# EAGLE board RAM (EAGLE 9.3.2), part 1 of 2
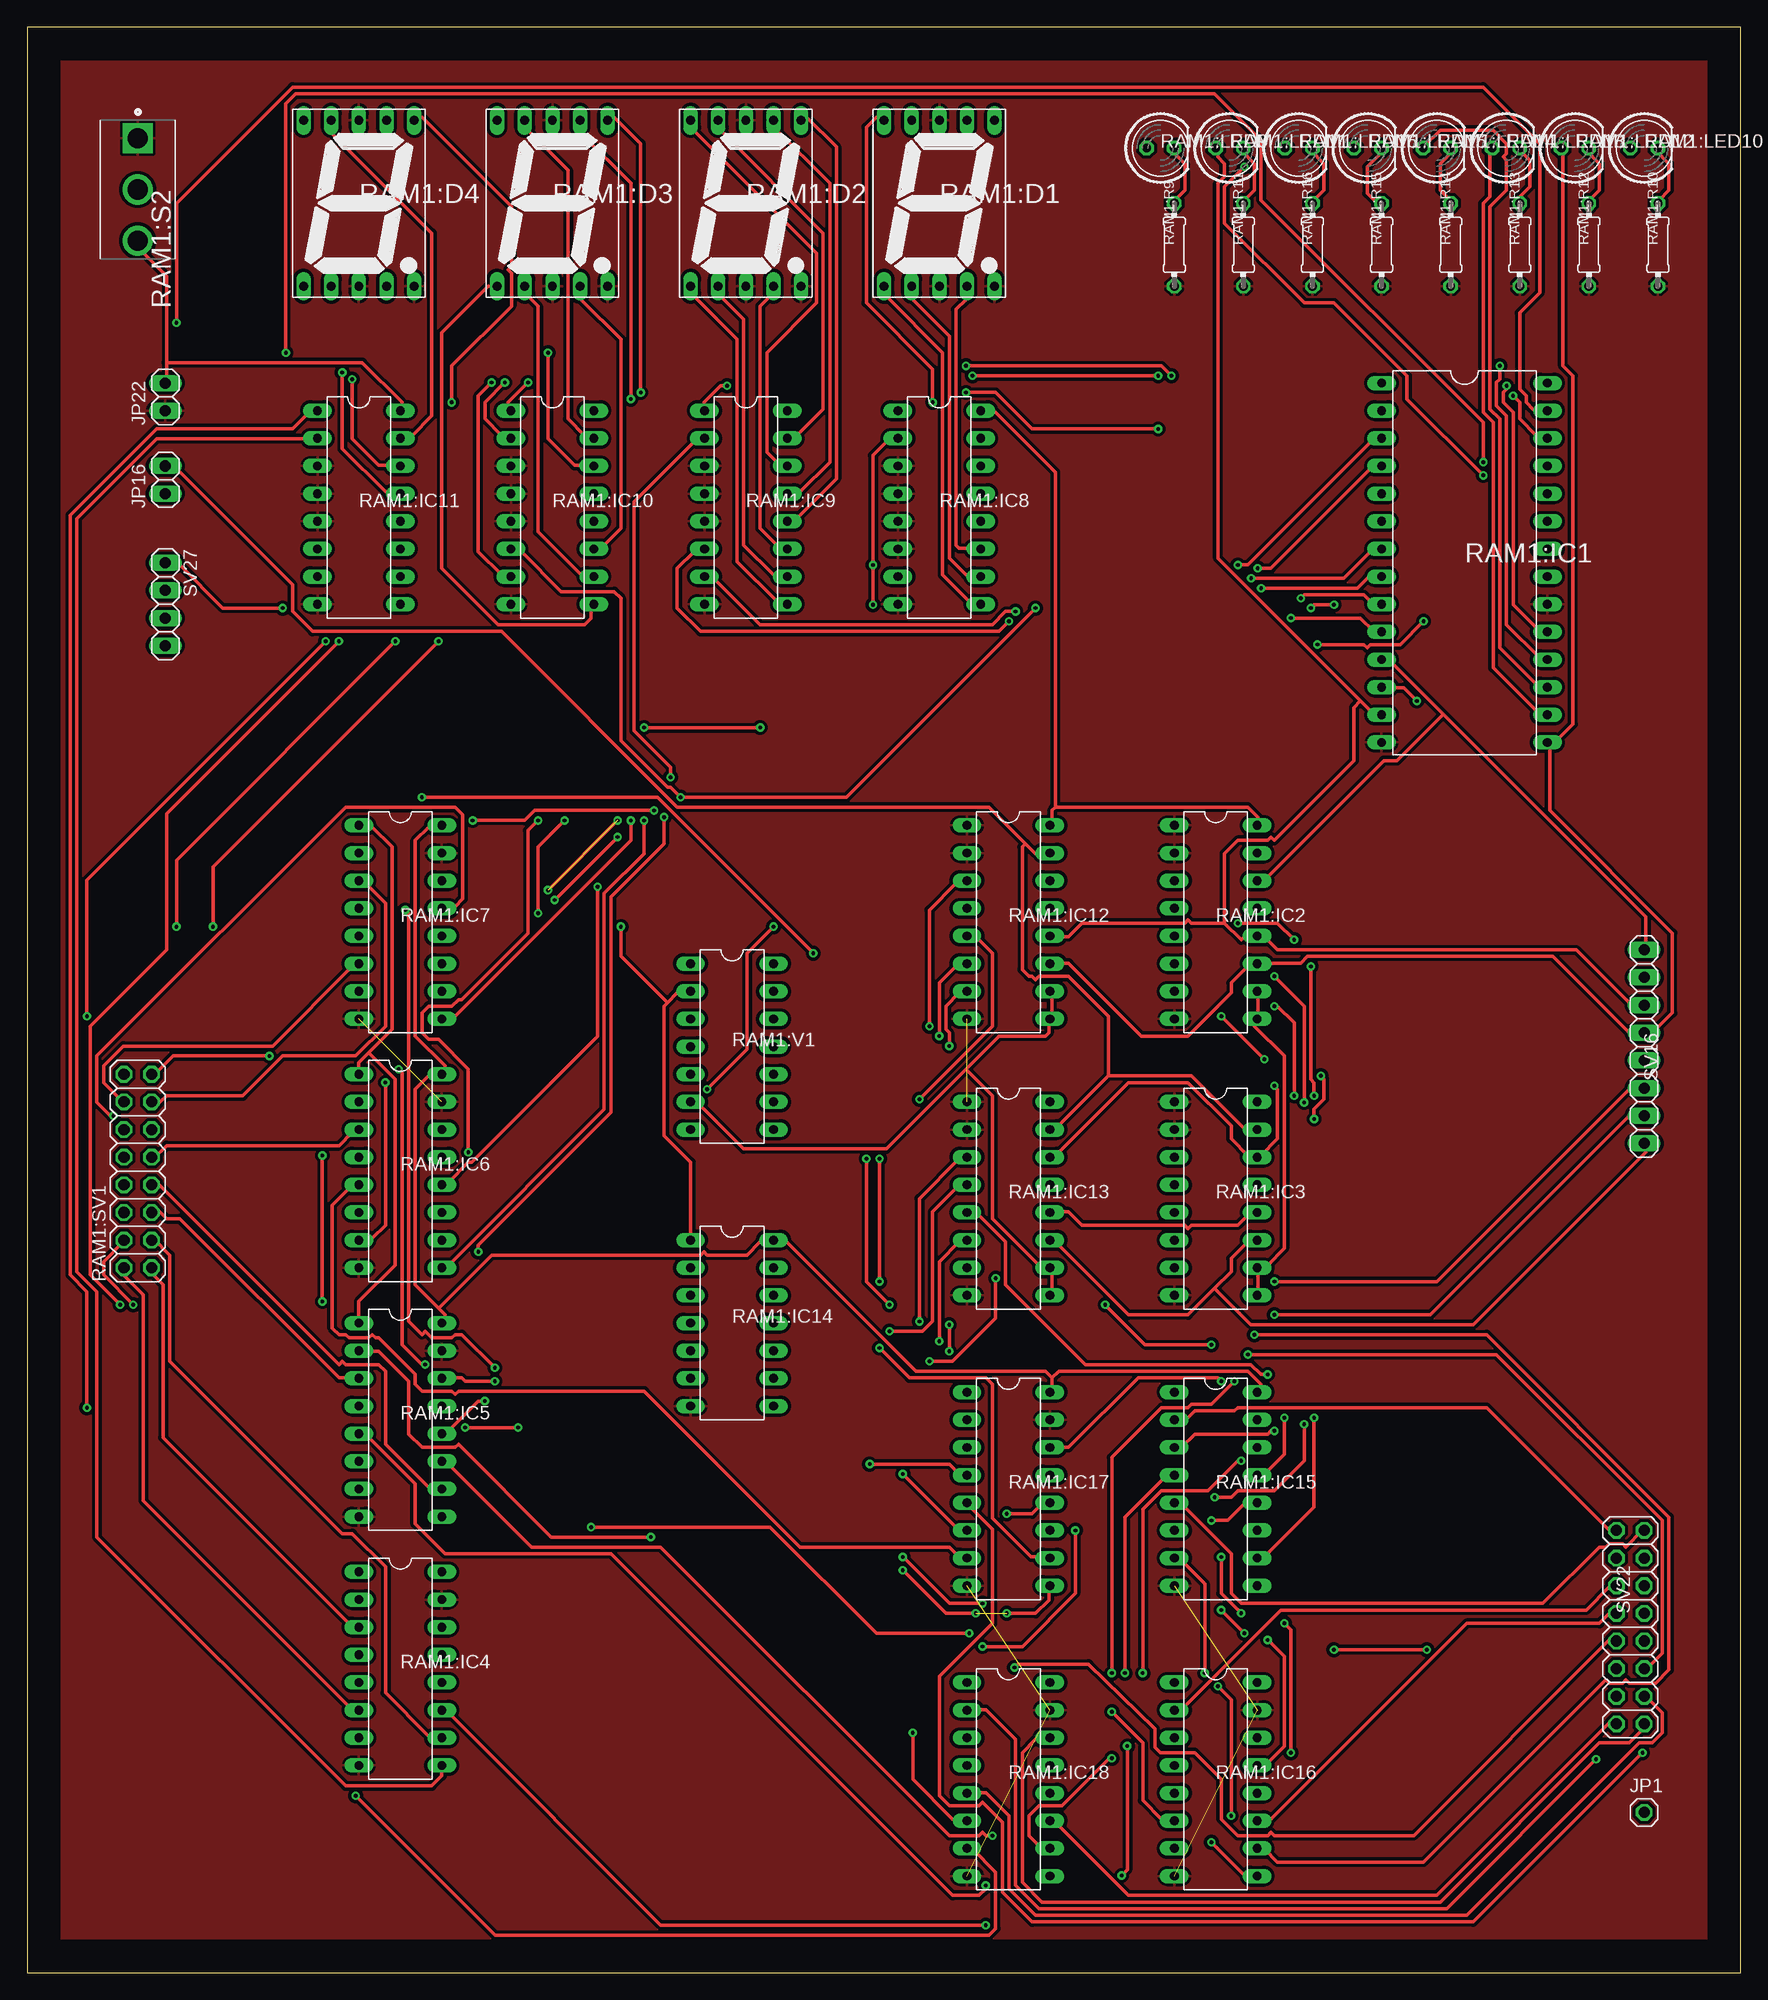
[diagram p0: board, top side]
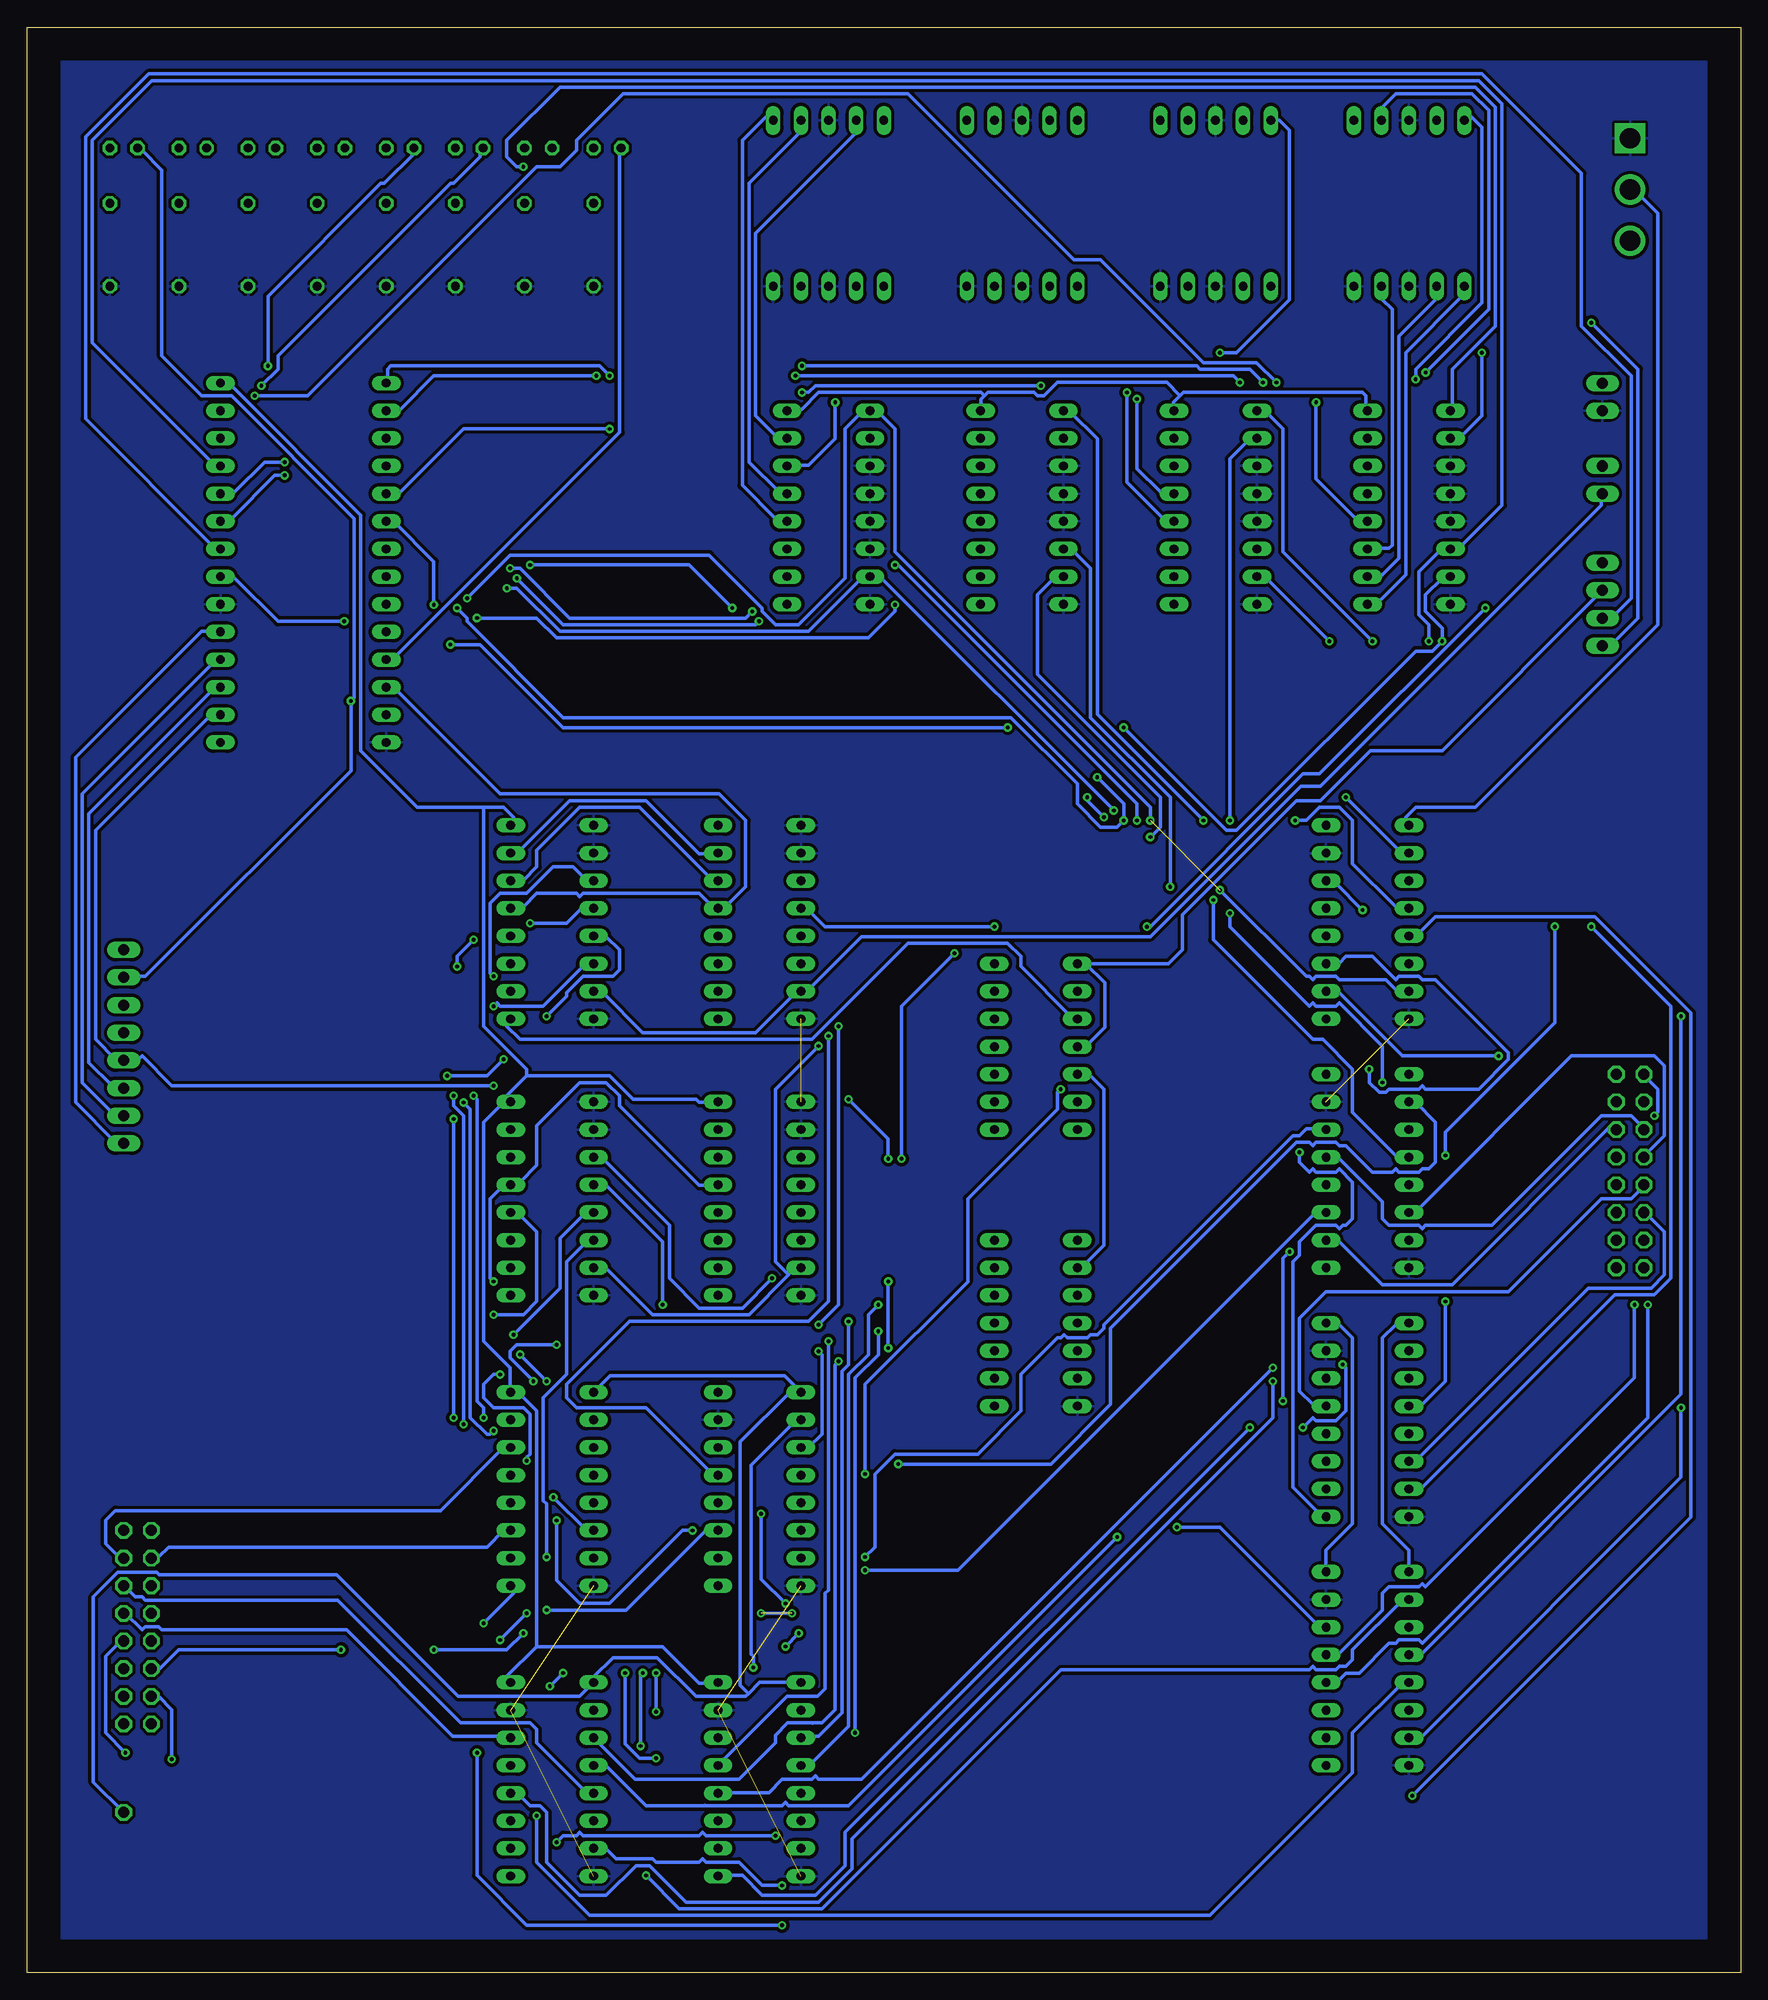
[diagram p1: board, bottom side, seen from below]

Size 157.46 x 178.74 mm. Coordinates in mm from the lower left corner, seen from the top.
Outline: 0,0 157.46,0 157.46,178.74 0,178.74 0,0
Copper layers (1*16): Top 0.035mm / dielectric 1.5mm / Bottom 0.035mm
Design rules "Endustriyel": minimum track width 12mil, minimum drill 0.35mm, track to track 12mil, track to pad 12mil, pad to pad 12mil, via to via 12mil, smd to smd 6mil, copper to edge 120mil, drill to drill 12mil, minimum pad ring 10mil, minimum via ring 8mil, stop-mask expansion 4mil, vias tented up to drill 0mil, thermal gap 10mil
Net classes: 0 default: width 0.254 mm

## Footprints (pad centres in the part's own frame; a part is rotated, then mirrored left to right if it is on the bottom)
1X01 = drill 1.016 octagon: 1 0,0
1X02 = drill 1.016 long: 1 -1.27,0; 2 1.27,0
7SEG-13 = drill 0.813 long: 1 -5.08,-7.62; 2 -2.54,-7.62; 3 0,-7.62; 4 2.54,-7.62; 5 5.08,-7.62; 6 5.08,7.62; 7 2.54,7.62; 8 0,7.62; 9 -2.54,7.62; 10 -5.08,7.62
DIL28-6 = drill 0.813 long: 1 -16.51,-7.62; 2 -13.97,-7.62; 3 -11.43,-7.62; 4 -8.89,-7.62; 5 -6.35,-7.62; 6 -3.81,-7.62; 7 -1.27,-7.62; 8 1.27,-7.62; 9 3.81,-7.62; 10 6.35,-7.62; 11 8.89,-7.62; 12 11.43,-7.62; 13 13.97,-7.62; 14 16.51,-7.62; 15 16.51,7.62; 16 13.97,7.62; 17 11.43,7.62; 18 8.89,7.62; 19 6.35,7.62; 20 3.81,7.62; 21 1.27,7.62; 22 -1.27,7.62; 23 -3.81,7.62; 24 -6.35,7.62; 25 -8.89,7.62; 26 -11.43,7.62; 27 -13.97,7.62; 28 -16.51,7.62
DIL16 = drill 0.813 long: 1 -8.89,-3.81; 2 -6.35,-3.81; 3 -3.81,-3.81; 4 -1.27,-3.81; 5 1.27,-3.81; 6 3.81,-3.81; 7 6.35,-3.81; 8 8.89,-3.81; 9 8.89,3.81; 10 6.35,3.81; 11 3.81,3.81; 12 1.27,3.81; 13 -1.27,3.81; 14 -3.81,3.81; 15 -6.35,3.81; 16 -8.89,3.81
DIL14 = drill 0.813 long: 1 -7.62,-3.81; 2 -5.08,-3.81; 3 -2.54,-3.81; 4 0,-3.81; 5 2.54,-3.81; 6 5.08,-3.81; 7 7.62,-3.81; 8 7.62,3.81; 9 5.08,3.81; 10 2.54,3.81; 11 0,3.81; 12 -2.54,3.81; 13 -5.08,3.81; 14 -7.62,3.81
LED5MM = drill 0.813 octagon: A -1.27,0; K 1.27,0
0204/7 = drill 0.813 octagon: 1 -3.81,0; 2 3.81,0
TE_4-1825136-5 = drill 1.854 square: 1 -4.699,0 | drill 1.854: 2 0,0; 3 4.699,0
2X08 = drill 1.016 octagon: 1 -8.89,-1.27; 2 -8.89,1.27; 3 -6.35,-1.27; 4 -6.35,1.27; 5 -3.81,-1.27; 6 -3.81,1.27; 7 -1.27,-1.27; 8 -1.27,1.27; 9 1.27,-1.27; 10 1.27,1.27; 11 3.81,-1.27; 12 3.81,1.27; 13 6.35,-1.27; 14 6.35,1.27; 15 8.89,-1.27; 16 8.89,1.27
1X08 = drill 1.016 long: 1 -8.89,0; 2 -6.35,0; 3 -3.81,0; 4 -1.27,0; 5 1.27,0; 6 3.81,0; 7 6.35,0; 8 8.89,0
1X04 = drill 1.016 long: 1 -3.81,0; 2 -1.27,0; 3 1.27,0; 4 3.81,0

## Placement (x,y rotation side)
JP1  [1X01]  148.59,14.73 0 top
JP16  [1X02]  12.7,137.16 90 top
JP22  [1X02]  12.7,144.78 90 top
RAM1:D1  [7SEG-13]  83.82,162.56 0 top
RAM1:D2  [7SEG-13]  66.04,162.56 0 top
RAM1:D3  [7SEG-13]  48.26,162.56 0 top
RAM1:D4  [7SEG-13]  30.48,162.56 0 top
RAM1:IC1  CY62256LL-PC  [DIL28-6]  132.08,129.54 270 top
RAM1:IC2  74HC173N  [DIL16]  109.22,96.52 270 top
RAM1:IC3  74HC173N  [DIL16]  109.22,71.12 270 top
RAM1:IC4  74AC157N  [DIL16]  34.29,27.94 270 top
RAM1:IC5  74AC157N  [DIL16]  34.29,50.8 270 top
RAM1:IC6  74AC157N  [DIL16]  34.29,73.66 270 top
RAM1:IC7  74AC157N  [DIL16]  34.29,96.52 270 top
RAM1:IC8  74LS47N  [DIL16]  83.82,134.62 270 top
RAM1:IC9  74LS47N  [DIL16]  66.04,134.62 270 top
RAM1:IC10  74LS47N  [DIL16]  48.26,134.62 270 top
RAM1:IC11  74LS47N  [DIL16]  30.48,134.62 270 top
RAM1:IC12  74HC173N  [DIL16]  90.17,96.52 270 top
RAM1:IC13  74HC173N  [DIL16]  90.17,71.12 270 top
RAM1:IC14  74AC04N  [DIL14]  64.77,59.69 270 top
RAM1:IC15  74AC157N  [DIL16]  109.22,44.45 270 top
RAM1:IC16  74AC157N  [DIL16]  109.22,17.78 270 top
RAM1:IC17  74AC157N  [DIL16]  90.17,44.45 270 top
RAM1:IC18  74AC157N  [DIL16]  90.17,17.78 270 top
RAM1:LED9  [LED5MM]  104.14,167.64 0 top
RAM1:LED10  [LED5MM]  148.59,167.64 0 top
RAM1:LED11  [LED5MM]  110.49,167.64 0 top
RAM1:LED12  [LED5MM]  142.24,167.64 0 top
RAM1:LED13  [LED5MM]  135.89,167.64 0 top
RAM1:LED14  [LED5MM]  129.54,167.64 0 top
RAM1:LED15  [LED5MM]  123.19,167.64 0 top
RAM1:LED16  [LED5MM]  116.84,167.64 0 top
RAM1:R9  220  [0204/7]  105.41,158.75 90 top
RAM1:R10  220  [0204/7]  149.86,158.75 90 top
RAM1:R11  220  [0204/7]  111.76,158.75 90 top
RAM1:R12  220  [0204/7]  143.51,158.75 90 top
RAM1:R13  220  [0204/7]  137.16,158.75 90 top
RAM1:R14  220  [0204/7]  130.81,158.75 90 top
RAM1:R15  220  [0204/7]  124.46,158.75 90 top
RAM1:R16  220  [0204/7]  118.11,158.75 90 top
RAM1:S2  [TE_4-1825136-5]  10.16,163.83 270 top
RAM1:SV1  [2X08]  10.16,73.66 90 top
RAM1:V1  7409N  [DIL14]  64.77,85.09 270 top
SV16  [1X08]  148.59,85.09 270 top
SV22  [2X08]  147.32,31.75 90 top
SV27  [1X04]  12.7,125.73 270 top

## Library data of the parts
JP1 JP16 JP22 = pinhead
RAM1:D1-RAM1:D4 = special
RAM1:IC1 = memory-sram
RAM1:IC2-RAM1:IC18 = 74xx-eu
RAM1:LED9-RAM1:LED16 = led
RAM1:R9-RAM1:R16 = rcl; SPICEPREFIX: R
RAM1:S2 = TE_4-1825136-5
RAM1:SV1 SV16 SV22 SV27 = pinhead; OC_FARNELL: unknown; OC_NEWARK: unknown
RAM1:V1 = 74ttl-din

## Nets
8B_1: RAM1:IC1.11 RAM1:IC2.14 RAM1:IC12.14 RAM1:LED9.A SV16.1
8B_2: RAM1:IC1.12 RAM1:IC2.13 RAM1:IC12.13 RAM1:LED10.A SV16.2
8B_3: RAM1:IC1.13 RAM1:IC2.12 RAM1:IC12.12 RAM1:LED11.A SV16.3
8B_4: RAM1:IC1.15 RAM1:IC2.11 RAM1:IC12.11 RAM1:LED12.A SV16.4
8B_5: RAM1:IC1.16 RAM1:IC3.14 RAM1:IC13.14 RAM1:LED13.A SV16.5
8B_6: RAM1:IC1.17 RAM1:IC3.13 RAM1:IC13.13 RAM1:LED14.A SV16.6
8B_7: RAM1:IC1.18 RAM1:IC3.12 RAM1:IC13.12 RAM1:LED15.A SV16.7
8B_8: RAM1:IC1.19 RAM1:IC3.11 RAM1:IC13.11 RAM1:LED16.A SV16.8
CLK: JP16.1 RAM1:IC2.7 RAM1:IC3.7 RAM1:IC12.7 RAM1:IC13.7
CLR: JP16.2 RAM1:IC2.15 RAM1:IC3.15 RAM1:IC12.15 RAM1:IC13.15
GND: JP22.1 RAM1:D1.3 RAM1:D1.5 RAM1:D1.8 RAM1:D2.3 RAM1:D2.5 RAM1:D2.8 RAM1:D3.3 RAM1:D3.5 RAM1:D3.8 RAM1:D4.3 RAM1:D4.5 RAM1:D4.8 RAM1:IC1.14 RAM1:IC1.20 RAM1:IC2.1 RAM1:IC2.2 RAM1:IC2.8 RAM1:IC3.1 RAM1:IC3.2 RAM1:IC3.8 RAM1:IC4.8 RAM1:IC4.15 RAM1:IC5.8 RAM1:IC5.15 RAM1:IC6.8 RAM1:IC6.15 RAM1:IC7.8 RAM1:IC7.15 RAM1:IC8.3 RAM1:IC8.4 RAM1:IC8.5 RAM1:IC8.6 RAM1:IC8.8 RAM1:IC9.3 RAM1:IC9.4 RAM1:IC9.5 RAM1:IC9.8 RAM1:IC10.3 RAM1:IC10.4 RAM1:IC10.5 RAM1:IC10.8 RAM1:IC11.3 RAM1:IC11.4 RAM1:IC11.5 RAM1:IC11.8 RAM1:IC12.1 RAM1:IC12.2 RAM1:IC12.8 RAM1:IC13.1 RAM1:IC13.2 RAM1:IC13.8 RAM1:IC14.7 RAM1:IC15.8 RAM1:IC16.8 RAM1:IC16.15 RAM1:IC17.8 RAM1:IC17.15 RAM1:IC18.8 RAM1:IC18.15 RAM1:R9.1 RAM1:R10.1 RAM1:R11.1 RAM1:R12.1 RAM1:R13.1 RAM1:R14.1 RAM1:R15.1 RAM1:R16.1 RAM1:S2.1
N$62: RAM1:IC18.14 SV22.1
N$63: RAM1:IC18.11 SV22.2
N$64: RAM1:IC18.5 SV22.3
N$65: RAM1:IC18.2 SV22.4
N$66: RAM1:IC15.5 SV22.15
N$67: RAM1:IC15.2 SV22.16
N$68: RAM1:IC15.14 SV22.13
N$69: RAM1:IC15.11 SV22.14
N$70: RAM1:IC16.5 SV22.11
N$71: RAM1:IC16.2 SV22.12
N$72: RAM1:IC16.11 SV22.10
N$73: RAM1:IC16.14 SV22.9
N$74: RAM1:IC17.2 SV22.8
N$75: RAM1:IC17.5 SV22.7
N$76: RAM1:IC17.11 SV22.6
N$77: RAM1:IC17.14 SV22.5
NNOW2: JP1.1 RAM1:IC15.1 RAM1:IC16.1 RAM1:IC17.1 RAM1:IC18.1
RAM1:+UB: RAM1:V1.14
RAM1:-UB: RAM1:V1.7
RAM1:A/M: RAM1:IC4.1 RAM1:IC5.1 RAM1:IC6.1 RAM1:IC7.1 RAM1:S2.2
RAM1:N$1: RAM1:IC12.9 RAM1:IC12.10 RAM1:IC13.9 RAM1:IC13.10 RAM1:V1.6
RAM1:N$2: RAM1:IC2.9 RAM1:IC2.10 RAM1:IC3.9 RAM1:IC3.10 RAM1:V1.3
RAM1:N$3: RAM1:IC14.2 RAM1:V1.5
RAM1:N$4: RAM1:IC4.2 RAM1:IC15.4
RAM1:N$5: RAM1:IC4.5 RAM1:IC15.7
RAM1:N$6: RAM1:IC4.11 RAM1:IC15.9
RAM1:N$7: RAM1:IC4.14 RAM1:IC15.12
RAM1:N$8: RAM1:IC5.2 RAM1:IC16.4
RAM1:N$9: RAM1:IC5.5 RAM1:IC16.7
RAM1:N$10: RAM1:IC5.11 RAM1:IC16.9
RAM1:N$11: RAM1:IC5.14 RAM1:IC16.12
RAM1:N$12: RAM1:IC6.2 RAM1:IC17.4
RAM1:N$13: RAM1:IC6.5 RAM1:IC17.7
RAM1:N$14: RAM1:IC6.11 RAM1:IC17.9
RAM1:N$15: RAM1:IC6.14 RAM1:IC17.12
RAM1:N$16: RAM1:IC7.2 RAM1:IC18.4
RAM1:N$17: RAM1:IC7.5 RAM1:IC18.7
RAM1:N$18: RAM1:IC7.11 RAM1:IC18.9
RAM1:N$19: RAM1:IC7.14 RAM1:IC18.12
RAM1:N$20: RAM1:IC4.3 RAM1:SV1.1
RAM1:N$21: RAM1:IC4.6 RAM1:SV1.2
RAM1:N$22: RAM1:IC4.10 RAM1:SV1.3
RAM1:N$23: RAM1:IC4.13 RAM1:SV1.4
RAM1:N$24: RAM1:IC5.3 RAM1:SV1.5
RAM1:N$25: RAM1:IC5.6 RAM1:SV1.6
RAM1:N$26: RAM1:IC5.10 RAM1:SV1.7
RAM1:N$27: RAM1:IC5.13 RAM1:SV1.8
RAM1:N$28: RAM1:IC6.3 RAM1:SV1.9
RAM1:N$29: RAM1:IC6.6 RAM1:SV1.10
RAM1:N$30: RAM1:IC6.10 RAM1:SV1.11
RAM1:N$31: RAM1:IC6.13 RAM1:SV1.12
RAM1:N$32: RAM1:IC7.3 RAM1:SV1.13
RAM1:N$33: RAM1:IC7.10 RAM1:SV1.15
RAM1:N$34: RAM1:IC7.13 RAM1:SV1.16
RAM1:N$35: RAM1:IC7.6 RAM1:SV1.14
RAM1:N$36: RAM1:IC1.21 RAM1:IC4.4 RAM1:IC11.7
RAM1:N$37: RAM1:IC1.23 RAM1:IC4.7 RAM1:IC11.1
RAM1:N$38: RAM1:D1.7 RAM1:IC8.13
RAM1:N$39: RAM1:D1.6 RAM1:IC8.12
RAM1:N$40: RAM1:IC1.24 RAM1:IC4.9 RAM1:IC11.2
RAM1:N$41: RAM1:IC1.25 RAM1:IC4.12 RAM1:IC11.6
RAM1:N$42: RAM1:IC1.26 RAM1:IC5.4 RAM1:IC10.7
RAM1:N$43: RAM1:IC1.1 RAM1:IC5.7 RAM1:IC10.1
RAM1:N$44: RAM1:IC1.2 RAM1:IC5.9 RAM1:IC10.2
RAM1:N$45: RAM1:IC1.3 RAM1:IC5.12 RAM1:IC10.6
RAM1:N$46: RAM1:IC1.4 RAM1:IC6.4 RAM1:IC9.7
RAM1:N$47: RAM1:IC1.5 RAM1:IC6.7 RAM1:IC9.1
RAM1:N$48: RAM1:IC1.6 RAM1:IC6.9 RAM1:IC9.2
RAM1:N$49: RAM1:IC1.7 RAM1:IC6.12 RAM1:IC9.6
RAM1:N$50: RAM1:IC1.8 RAM1:IC7.4 RAM1:IC8.7
RAM1:N$51: RAM1:IC1.9 RAM1:IC7.7 RAM1:IC8.1
RAM1:N$52: RAM1:IC1.10 RAM1:IC7.9 RAM1:IC8.2
RAM1:N$53: RAM1:IC2.3 RAM1:IC15.3
RAM1:N$54: RAM1:D1.4 RAM1:IC8.11
RAM1:N$55: RAM1:D1.2 RAM1:IC8.10
RAM1:N$56: RAM1:D1.1 RAM1:IC8.9
RAM1:N$57: RAM1:D1.9 RAM1:IC8.15
RAM1:N$58: RAM1:D1.10 RAM1:IC8.14
RAM1:N$59: RAM1:D2.7 RAM1:IC9.13
RAM1:N$60: RAM1:D2.6 RAM1:IC9.12
RAM1:N$61: RAM1:D2.4 RAM1:IC9.11
RAM1:N$62: RAM1:D2.2 RAM1:IC9.10
RAM1:N$63: RAM1:D2.1 RAM1:IC9.9
RAM1:N$64: RAM1:D2.9 RAM1:IC9.15
RAM1:N$65: RAM1:D2.10 RAM1:IC9.14
RAM1:N$66: RAM1:D3.7 RAM1:IC10.13
RAM1:N$67: RAM1:D3.6 RAM1:IC10.12
RAM1:N$68: RAM1:D3.4 RAM1:IC10.11
RAM1:N$69: RAM1:D3.2 RAM1:IC10.10
RAM1:N$70: RAM1:D3.1 RAM1:IC10.9
RAM1:N$71: RAM1:D3.9 RAM1:IC10.15
RAM1:N$72: RAM1:D3.10 RAM1:IC10.14
RAM1:N$73: RAM1:D4.7 RAM1:IC11.13
RAM1:N$74: RAM1:D4.6 RAM1:IC11.12
RAM1:N$75: RAM1:D4.4 RAM1:IC11.11
RAM1:N$76: RAM1:D4.2 RAM1:IC11.10
RAM1:N$77: RAM1:D4.1 RAM1:IC11.9
RAM1:N$78: RAM1:D4.9 RAM1:IC11.15
RAM1:N$79: RAM1:D4.10 RAM1:IC11.14
RAM1:N$80: RAM1:IC2.4 RAM1:IC15.6
RAM1:N$81: RAM1:IC2.5 RAM1:IC15.10
RAM1:N$82: RAM1:IC2.6 RAM1:IC15.13
RAM1:N$83: RAM1:IC3.3 RAM1:IC16.3
RAM1:N$84: RAM1:IC3.4 RAM1:IC16.6
RAM1:N$85: RAM1:IC3.5 RAM1:IC16.10
RAM1:N$86: RAM1:IC3.6 RAM1:IC16.13
RAM1:N$87: RAM1:IC12.3 RAM1:IC17.3
RAM1:N$88: RAM1:IC12.4 RAM1:IC17.6
RAM1:N$89: RAM1:IC12.5 RAM1:IC17.10
RAM1:N$90: RAM1:IC12.6 RAM1:IC17.13
RAM1:N$91: RAM1:IC13.3 RAM1:IC18.3
RAM1:N$92: RAM1:IC13.4 RAM1:IC18.6
RAM1:N$93: RAM1:IC13.5 RAM1:IC18.10
RAM1:N$94: RAM1:IC13.6 RAM1:IC18.13
RAM1:N$95: RAM1:LED9.K RAM1:R9.2
RAM1:N$96: RAM1:LED10.K RAM1:R10.2
RAM1:N$97: RAM1:LED11.K RAM1:R11.2
RAM1:N$98: RAM1:LED12.K RAM1:R12.2
RAM1:N$99: RAM1:LED13.K RAM1:R13.2
RAM1:N$100: RAM1:LED14.K RAM1:R14.2
RAM1:N$101: RAM1:LED15.K RAM1:R15.2
RAM1:N$102: RAM1:LED16.K RAM1:R16.2
RAM1:N$111: RAM1:IC15.15
RAM1:NC: RAM1:IC7.12
RAM_LRS: RAM1:IC14.1 RAM1:V1.2 SV27.1
SLC_ADDR: RAM1:V1.1 RAM1:V1.4 SV27.2
VCC: JP22.2 RAM1:IC1.28 RAM1:IC2.16 RAM1:IC3.16 RAM1:IC4.16 RAM1:IC5.16 RAM1:IC6.16 RAM1:IC7.16 RAM1:IC8.16 RAM1:IC9.16 RAM1:IC10.16 RAM1:IC11.16 RAM1:IC12.16 RAM1:IC13.16 RAM1:IC14.14 RAM1:IC15.16 RAM1:IC16.16 RAM1:IC17.16 RAM1:IC18.16 RAM1:S2.3
|RAM_OUT: RAM1:IC1.22 SV27.3
|RAM_WRITE: RAM1:IC1.27 SV27.4